# Altium PCB PCB1.PcbDoc
Units mm, origin at the board's own origin, x right, y up, seen from the top; angles counter-clockwise.
Board outline 39.37 x 25.15 mm, 2 copper layers (Top Layer, Bottom Layer); 15 components, 8 nets, 35 pads, 27 vias.
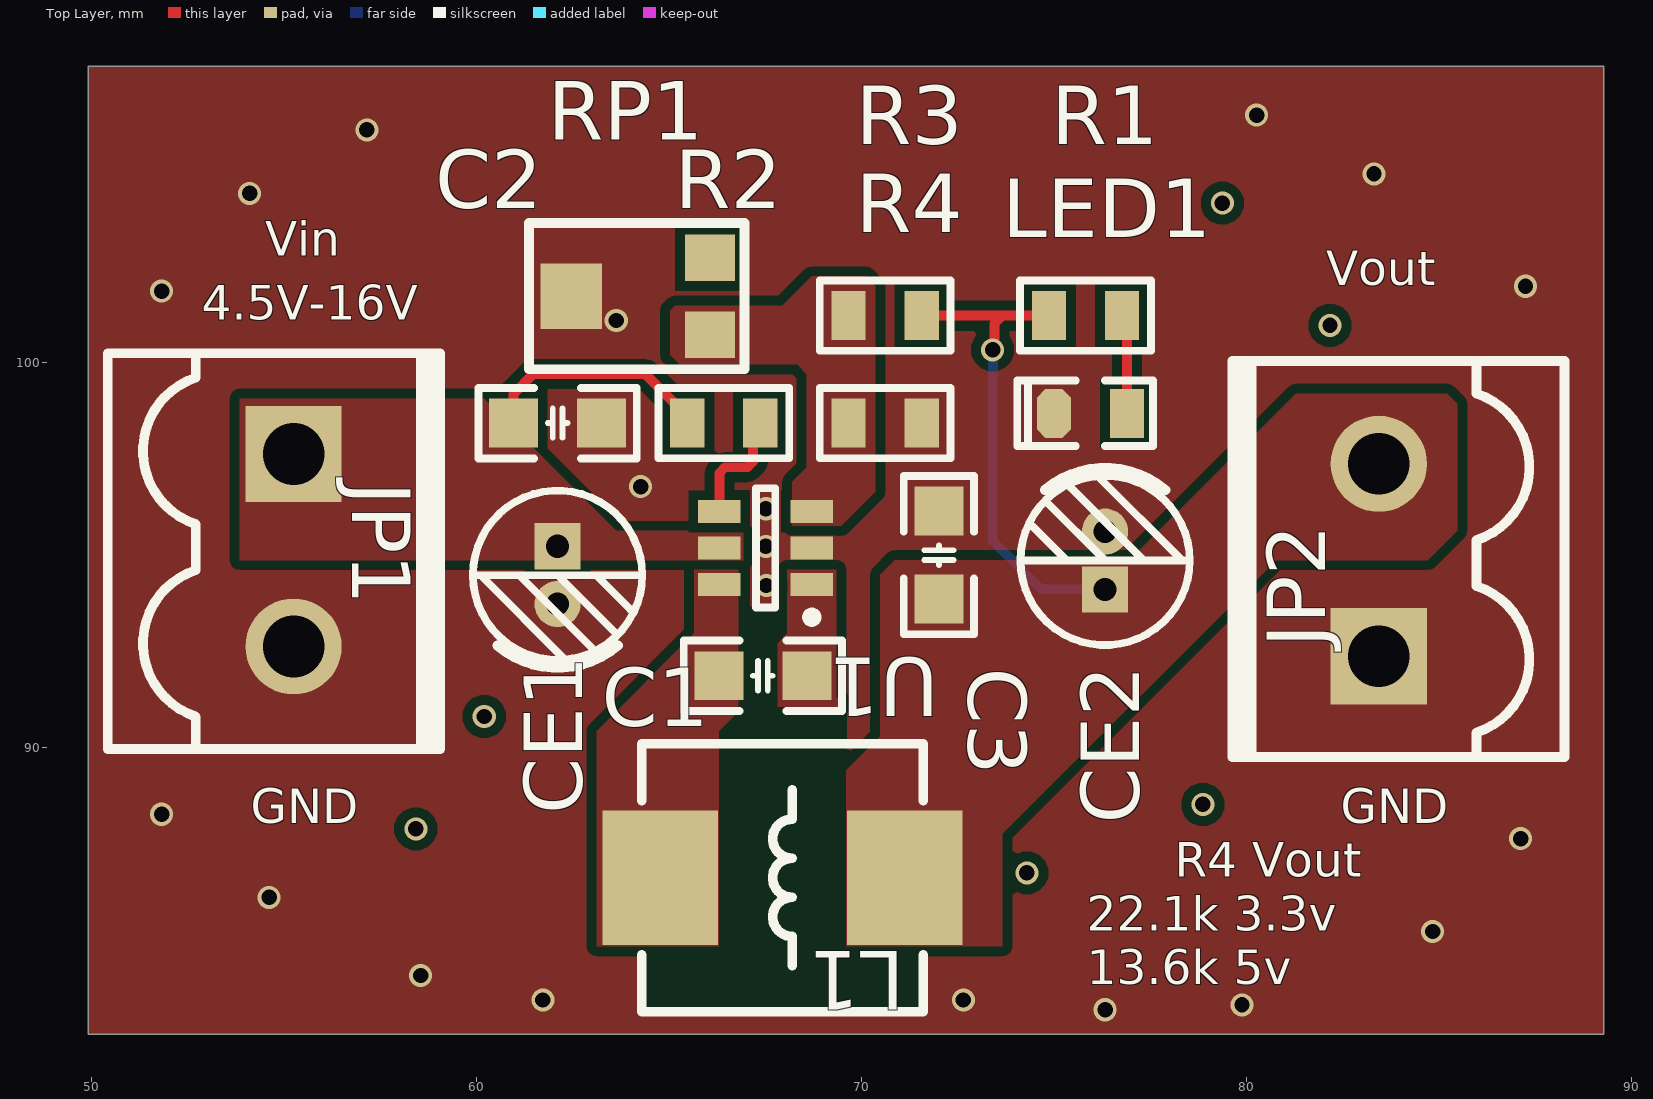
[diagram p0: Top Layer view]
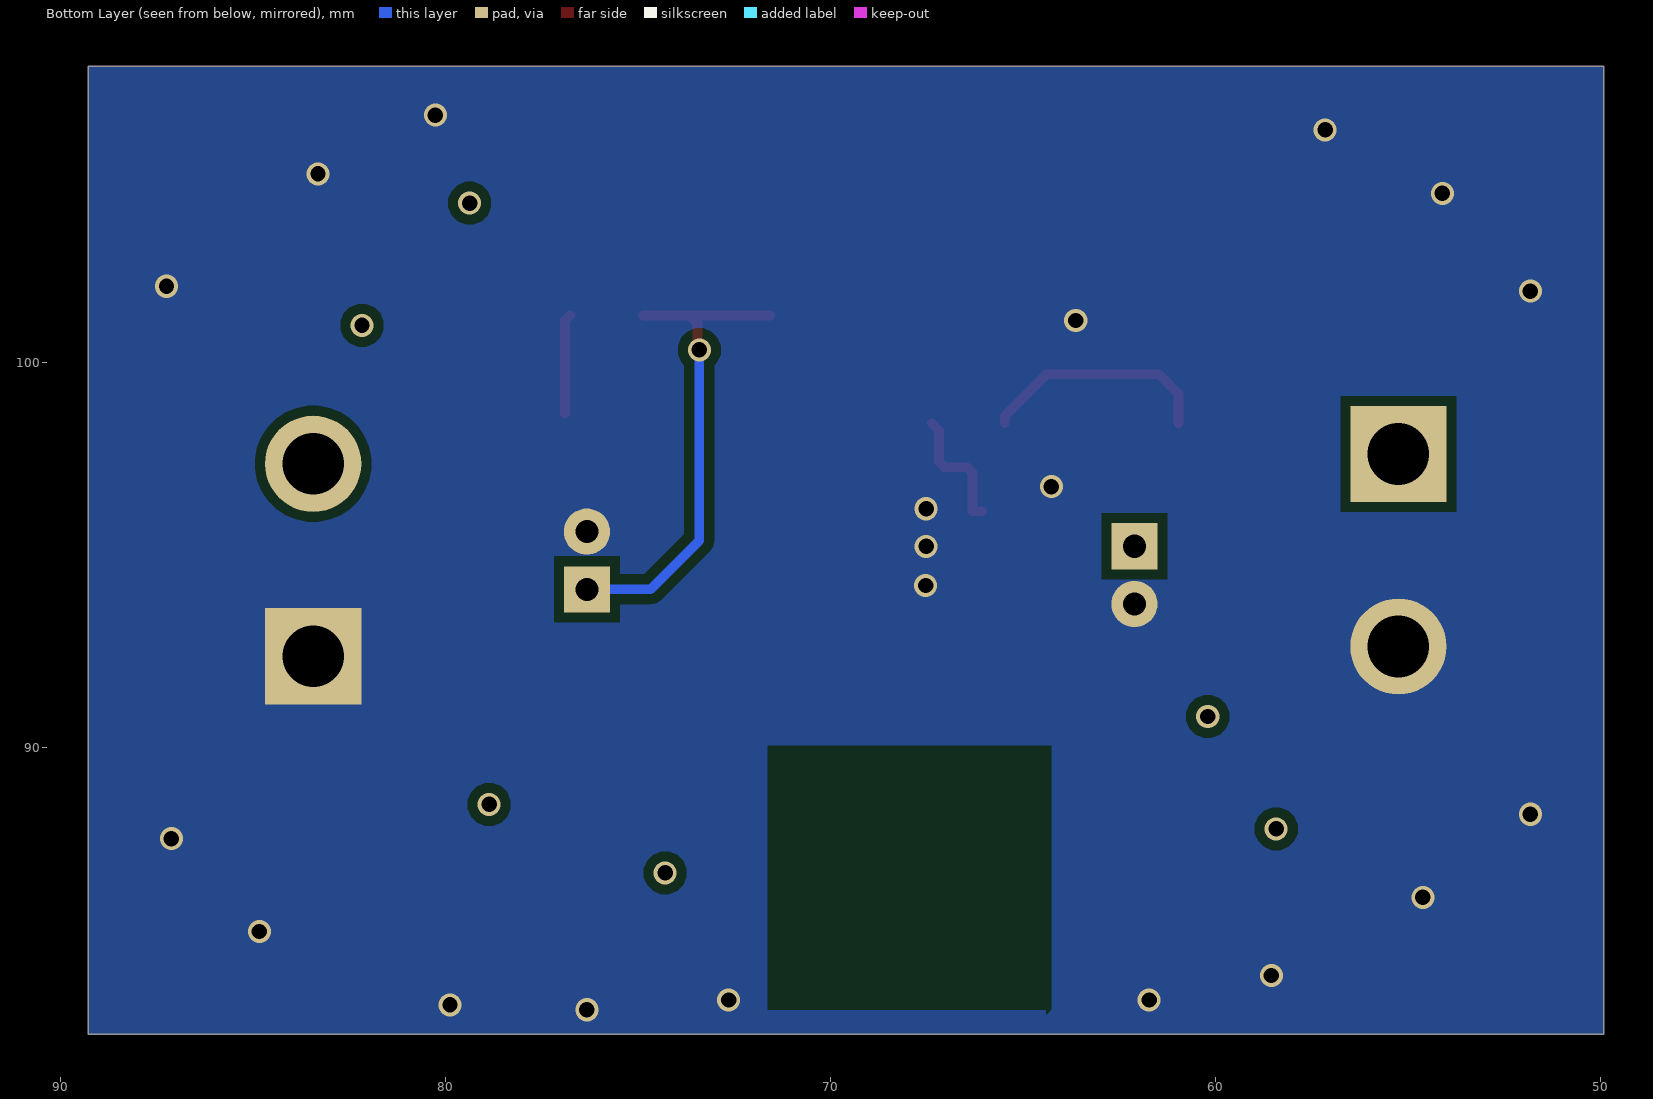
[diagram p1: Bottom Layer view, seen from below]

## Layer stack, top to bottom
Top Solder: solder mask 0.0102, Solder Resist, Dk 3.5
Top Layer: signal copper 0.0356
Dielectric 1: dielectric 0.32, FR-4, Dk 4.8
Bottom Layer: signal copper 0.0356
Bottom Solder: solder mask 0.0102, Solder Resist, Dk 3.5

## Board outline
49.911,82.55 49.911,107.696 89.281,107.696 89.281,82.55

## Design rules (kind name [scope] priority, off if disabled: settings)
Clearance [All] p1: gap=0.254 ignorepadtopadclearanceinfootprint=FALSE except(0: Arc-Hole Track-Hole SMDPad-Hole THPad-Hole Via-Hole Fill-Hole Poly-Hole Region-Hole Text-Hole)
PolygonConnect [All] p1: connectstyle=Direct reliefconductorwidth=0.254 reliefentries=4 polygonreliefangle="90 Angle" airgapwidth=0.254
RoutingVias [All] p1: holewidth=0.711 width=1.27 viastyle="Through Hole" minholewidth=0.711 minwidth=1.27 maxholewidth=0.711 maxwidth=1.27
SolderMaskExpansion [All] p1: expansion=0.102 istentingtop=FALSE
Width [All] p1: maxlimit=0.254 minlimit=0.254 preferedwidth=0.254
30 further rules are at their usual default settings.

## Components (designator, comment, footprint, x,y, rotation, side; value= is the part's Value field where it differs from the comment)
C1 "223" "C 0805-M" 67.437,91.864 r0 top
C2 "226" "C 0805-M" 62.103,98.425 r180 top
C3 "226" "C 0805-M" 72.009,94.996 r270 top
CE1 "10uF/16V" "CAP 1.5*4*8" 62.103,94.476 r270 top
CE2 "10uF/16V" "CAP 1.5*4*8" 76.327,94.857 r90 top
JP1 "HDR-1X2" KF2EDGK5.0-LI-2P 55.245,95.123 r270 top
JP2 "HDR-1X2" KF2EDGK5.0-LI-2P 83.439,94.869 r90 top
L1 "10uH" L-SMD-0630 67.945,86.614 r180 top
LED1 "红色" "LED 0805G" 75.946,98.679 r180 top
R1 "5.1k" "R 0805_L" 75.819,101.219 r180 top
R2 "10k" "R 0805_L" 66.421,98.425 r180 top
R3 "100k" "R 0805_L" 70.612,101.219 r180 top
R4 "22.1k/13.6k" "R 0805_L" 70.612,98.425 r180 top
RP1 "50k" 3303W 64.262,101.722 r90 top
U1 "MT2492" SOT23-6N 67.507,95.184 r180 top

## Footprints (in the part's own frame and the unit in brackets; to place one, negate y for a bottom-side part, rotate by r counter-clockwise, add the part's x,y. Pads: shape width x height; smd on the part's side, far side on the other; paste and mask are expansions set on the pad)
3303W [mm] "3.5*3.1*1.5mm                          淘宝ID:黄晶宝石"
  rect 1.2x1.3 smd: 1(-1,-1.8) 3(1,-1.8)
  rect 1.7x1.6 smd: 2(0,1.8)
  silkscreen extent -1.9,-2.7 1.9,2.9, body extent -1.55,-2.05 1.55,2.05
"C 0805-M" [mil] "无极性贴片电容"
  rect 50x50 smd: 1(-45,0) 2(45,0)
  silkscreen extent -81,-36 81,36, body extent -39,-24 39,24, height 20
"CAP 1.5*4*8" [mm] "脚距1.5mm直径4mm高度8mm"
  rect 1.2x1.2 hole 0.6: 1(-0.75,0)
  round 1.2 hole 0.6: 2(0.75,0)
  silkscreen extent -2.2,-2.2 2.41,2.2, body extent -2,-2 2.02,2, height 8.15
KF2EDGK5.0-LI-2P [mm] "立插端子                  淘宝ID:黄晶宝石"
  rect 2.5x2.5 hole 1.6: 1(-2.5,0)
  round 2.5 hole 1.6: 2(2.5,0)
  silkscreen extent -5.12,-4.83 5.17,3.81, body extent -5.04,-4.75 5.04,3.75, height 11.25
L-SMD-0630 [mm] "一体化成型电感"
  rect 3x3.5 smd: 1(-3.175,0) 2(3.175,0)
  silkscreen extent -3.66,-3.48 3.66,3.48, body extent -3.47,-3.3 3.48,3.3, height 3.05
"LED 0805G" [mil] "绿色0805LED"
  rect 35x50 smd: 1(-37.4,0)
  oct 35x50 smd: 2(37.4,0)
  silkscreen extent -64,-33 75,33, body extent -39,-25 39,25, height 32
"R 0805_L" [mil] "1/8W贴片电阻                   淘宝ID:黄晶宝石"
  rect 35x50 smd: 1(-37.4,0) 2(37.4,0)
  silkscreen extent -67,-36 67,36, body extent -39,-25 39,25, height 20
SOT23-6N [mm] "SOT-23, 6-Leads, Body 2.90x1.60mm, Pitch 0.95mm, IPC Medium Density封装库来自淘宝卖家 ID：黄晶宝石"
  rect 1.1x0.6 smd: 1(-1.2,0.95) 2(-1.2,0) 3(-1.2,-0.95) 4(1.2,-0.95) 5(1.2,0) 6(1.2,0.95)
  silkscreen extent -1.33,-1.55 0.25,1.92, body extent -1.4,-1.5 1.4,1.5, height 1.15

## Part data
C1 C2 C3: library part C, "贴片电容", BOM名称=无极性贴片电容, 优秀评价可免费更新=联系淘宝ID：黄晶宝石，获取更新版封装库, 本封装库来自淘宝卖家 ID：黄晶宝石=其他店铺购入均为盗版，请立即申请退款, 联系卖家，免费查找封装=唯一出售店铺网址https://shop463601444.taobao.com
CE1 CE2: library part CE, "直插电解电容", BOM名称=直插电解电容, 优秀评价可免费更新=联系淘宝ID：黄晶宝石，获取更新版封装库, 本封装库来自淘宝卖家 ID：黄晶宝石=其他店铺购入均为盗版，请立即申请退款, 联系卖家，免费查找封装=唯一出售店铺网址https://shop463601444.taobao.com
JP1 JP2: library part "Header 2", "2P接插件", BOM名称=2P接插件, 优秀评价可免费更新封装库=联系淘宝ID：黄晶宝石，获取更新版封装库, 卖家免费技术支持，联系售后=唯一出售店铺网址https://shop463601444.taobao.com, 封装库来自淘宝卖家 ID：黄晶宝石=其他店铺购入均为盗版，请立即申请退款, 版权归属="封装库来自淘宝 ID：黄晶宝石"
L1: library part L-NR, "NR磁胶电感", BOM名称=NR磁胶电感, 优秀评价可免费更新=联系淘宝ID：黄晶宝石，获取更新版封装库, 本封装库来自淘宝卖家 ID：黄晶宝石=其他店铺购入均为盗版，请立即申请退款, 联系卖家，免费查找封装=唯一出售店铺网址https://shop463601444.taobao.com
LED1: library part LED-SMD, "贴片LED", BOM名称=贴片LED, 卖家免费查找封装，联系售后=唯一出售店铺网址https://shop463601444.taobao.com, 封装库来自淘宝卖家 ID：黄晶宝石=其他店铺购入均为假冒，请立即申请退款，本店奖励2~5元现金
R1 R2 R3 R4: library part R, "贴片电阻", BOM名称=贴片电阻, 优秀评价可免费更新=联系淘宝ID：黄晶宝石，获取更新版封装库, 本封装库来自淘宝卖家 ID：黄晶宝石=其他店铺购入均为盗版，请立即申请退款, 联系卖家，免费查找封装=唯一出售店铺网址https://shop463601444.taobao.com
RP1: library part RP-SMD, "贴片电位器", BOM名称=贴片电位器, 优秀评价可免费更新=联系淘宝ID：黄晶宝石，获取更新版封装库, 本封装库来自淘宝卖家 ID：黄晶宝石=其他店铺购入均为盗版，请立即申请退款, 联系卖家，免费查找封装=唯一出售店铺网址https://shop463601444.taobao.com
U1: library part MP2359, "DC降压芯片", BOM名称=DC降压芯片, 卖家免费技术支持，联系售后=唯一出售店铺网址https://shop463601444.taobao.com, 卖家免费查找封装，联系售后=唯一出售店铺网址https://shop463601444.taobao.com, 封装库来自淘宝卖家 ID：黄晶宝石=其他店铺购入均为假冒，请立即申请退款，本店奖励2~5元现金

## Via types
v1: diameter 0.6, hole 0.4, Top Layer to Bottom Layer, 27 vias

## Nets (pads, with @x,y where several pads share a name; then routed paths per layer and width w, separated by ;. In a path a pad name is that pad's centre, name@x,y a point inside that pad or via, vN(x,y) a via of type N, cw(c..) or ccw(c..) an arc to the next point about the centre after c; other vN are vias at no path point)
+12: C2.2 CE1.1 JP1.1 R2.2 U1.5 | length 6.1
  Top Layer w0.254: C2.2 60.96,99.187 61.468,99.695 64.392,99.695 65.471,98.616 R2.2
GND: C2.1 C3.1 CE1.2 CE2.2 JP1.2 JP2.1 LED1.2 R4.1 RP1.2 U1.2
  other v1: 76.327,83.185 79.883,83.312 61.722,83.439 72.644,83.439 58.547,84.074 84.836,85.217 54.61,86.106 87.122,87.63 51.816,88.265 67.527,94.208 67.514,95.224 67.514,96.202 64.262,96.774 63.627,101.092 51.816,101.854 87.249,101.981 54.102,104.394 83.312,104.902 57.15,106.045 80.264,106.426
NetC1_1: C1.1 L1.2 U1.6
NetC1_2: C1.2 U1.1
NetLED1_1: LED1.1 R1.1 | length 2.6
  Top Layer w0.254: R1.1 76.896,101.092 LED1.1
NetR2_1: R2.1 U1.4 | length 3.3
  Top Layer w0.254: U1.4@66.057,96.134 U1.4 66.307,97.133 66.456,97.282 67.034,97.282 67.183,97.431 67.183,98.237 R2.1
NetR3_2: R3.2 R4.2 RP1.1 U1.3
VCC: C3.2 CE2.1 JP2.2 L1.1 R1.2 R3.1 | length 12.7
  Top Layer w0.254: R3.1 73.66,101.219 ; v1(73.406,100.33) 73.452,100.376 73.452,101.011 73.66,101.219 ; R1.2 73.66,101.219
  Bottom Layer w0.254: v1(73.406,100.33) 73.406,95.377 74.676,94.107 CE2.1
pads on no net: RP1.3
copper on no net:
  other v1: 74.295,86.741 58.42,87.884 78.867,88.519 60.198,90.805 82.169,100.965 79.375,104.14

## Polygon pours and split planes (outlines as drawn)
GND on Top Layer "GND_L01_P008" (solid, remove dead copper, pour order 8): 49.911,107.696 49.911,82.55 89.281,82.55 89.281,107.696
+12 on Top Layer "+12_L01_P000" (solid, pour order 0): 53.848,99.06 53.848,94.869 66.929,94.869 66.929,95.631 63.627,95.631 60.198,99.06
GND on Top Layer "GND_L01_P007" (solid, pour order 7): 68.072,95.631 67.945,95.758 67.945,96.774 67.056,96.774 67.056,93.599 67.818,93.599 67.818,94.742 69.342,94.742 69.342,95.631
NetR3_2 on Top Layer "NETR3_2_L01_P006" (solid, pour order 6): 68.199,95.758 68.199,96.901 68.58,97.282 68.58,99.695 68.326,99.949 65.278,99.949 65.024,100.203 65.024,101.346 65.151,101.473 67.945,101.473 68.707,102.235 70.104,102.235 70.358,101.981 70.358,96.647 69.469,95.758
VCC on Top Layer "VCC_L01_P004" (solid, pour order 4): 69.596,84.836 69.596,89.408 70.485,90.297 70.485,94.488 70.866,94.869 77.216,94.869 77.216,95.123 81.28,99.187 85.217,99.187 85.471,98.933 85.471,95.631 84.709,94.869 80.772,94.869 73.66,87.757 73.66,84.836
NetC1_1 on Top Layer "NETC1_1_L01_P001" (solid, pour order 1): 66.802,90.932 66.294,90.424 66.294,84.836 63.119,84.836 63.119,90.424 65.659,92.964 65.659,94.615 66.802,94.615
NetC1_2 on Top Layer "NETC1_2_L01_P002" (solid, pour order 2): 68.072,94.615 68.072,92.964 67.818,92.71 67.818,91.059 69.596,91.059 69.342,91.313 69.342,94.615
GND on Bottom Layer "GND_L02_P009" (solid, remove dead copper, pour order 9): 49.911,107.696 49.911,82.55 89.281,82.55 89.281,107.696

## Other copper
Top Layer:
  pour cut-out: 67.056,93.599 67.818,93.599 67.818,91.059 68.001,90.876 69.613,90.876 69.613,89.791 69.594,89.773 69.578,89.789 66.421,89.789 66.421,90.551 66.929,91.059 66.929,93.472
  pour cut-out: 64.262,84.582 64.262,83.185 64.389,83.058 71.628,83.058 71.628,84.582 71.6,84.61 69.477,84.61 69.477,90.035 69.469,90.043 66.294,90.043 66.294,84.84 66.524,84.61 66.496,84.582
Bottom Layer:
  pour cut-out: 64.389,83.058 64.262,83.185 64.262,90.043 71.628,90.043 71.628,83.185 64.389,83.185

## Silkscreen, mask and mechanical layers (free items; w line width, h text height)
Top Overlay:
  text "Vin" at 54.508,102.768 h0.89
  text "Vout" at 82.067,102.006 h0.89
  text "4.5V-16V" at 52.857,101.117 h0.89
  text "GND" at 54.127,88.036 h0.89
  text "GND" at 82.448,88.036 h0.89
  text "R4 Vout" at 78.13,86.639 h0.89
  text "22.1k 3.3v" at 75.844,85.242 h0.89
  text "13.6k 5v" at 75.844,83.845 h0.89
Mechanical 1:
  circle w0.254: c52.578,84.709 r1.5
  circle w0.254: c86.868,84.709 r1.5
  circle w0.254: c86.868,105.41 r1.5
  circle w0.254: c52.578,105.41 r1.5
  lines w0.254: 49.911,82.55 89.281,82.55 89.281,107.696 49.911,107.696 49.911,82.55

## Dimensions
89.281,82.55 to 89.281,107.696 on Mechanical 13
49.911,82.55 to 89.281,82.55 on Mechanical 13